# Altium PCB Copy of CAN_ESP.PcbDoc (part 2 of 2)
Units mm, origin at the board's own origin, x right, y up, seen from the top; angles counter-clockwise.
Board outline 43.47 x 32.7 mm, 2 copper layers (Top Layer, Bottom Layer), stack 1.1 mm thick; 66 components, 64 nets, 253 pads, 221 vias.
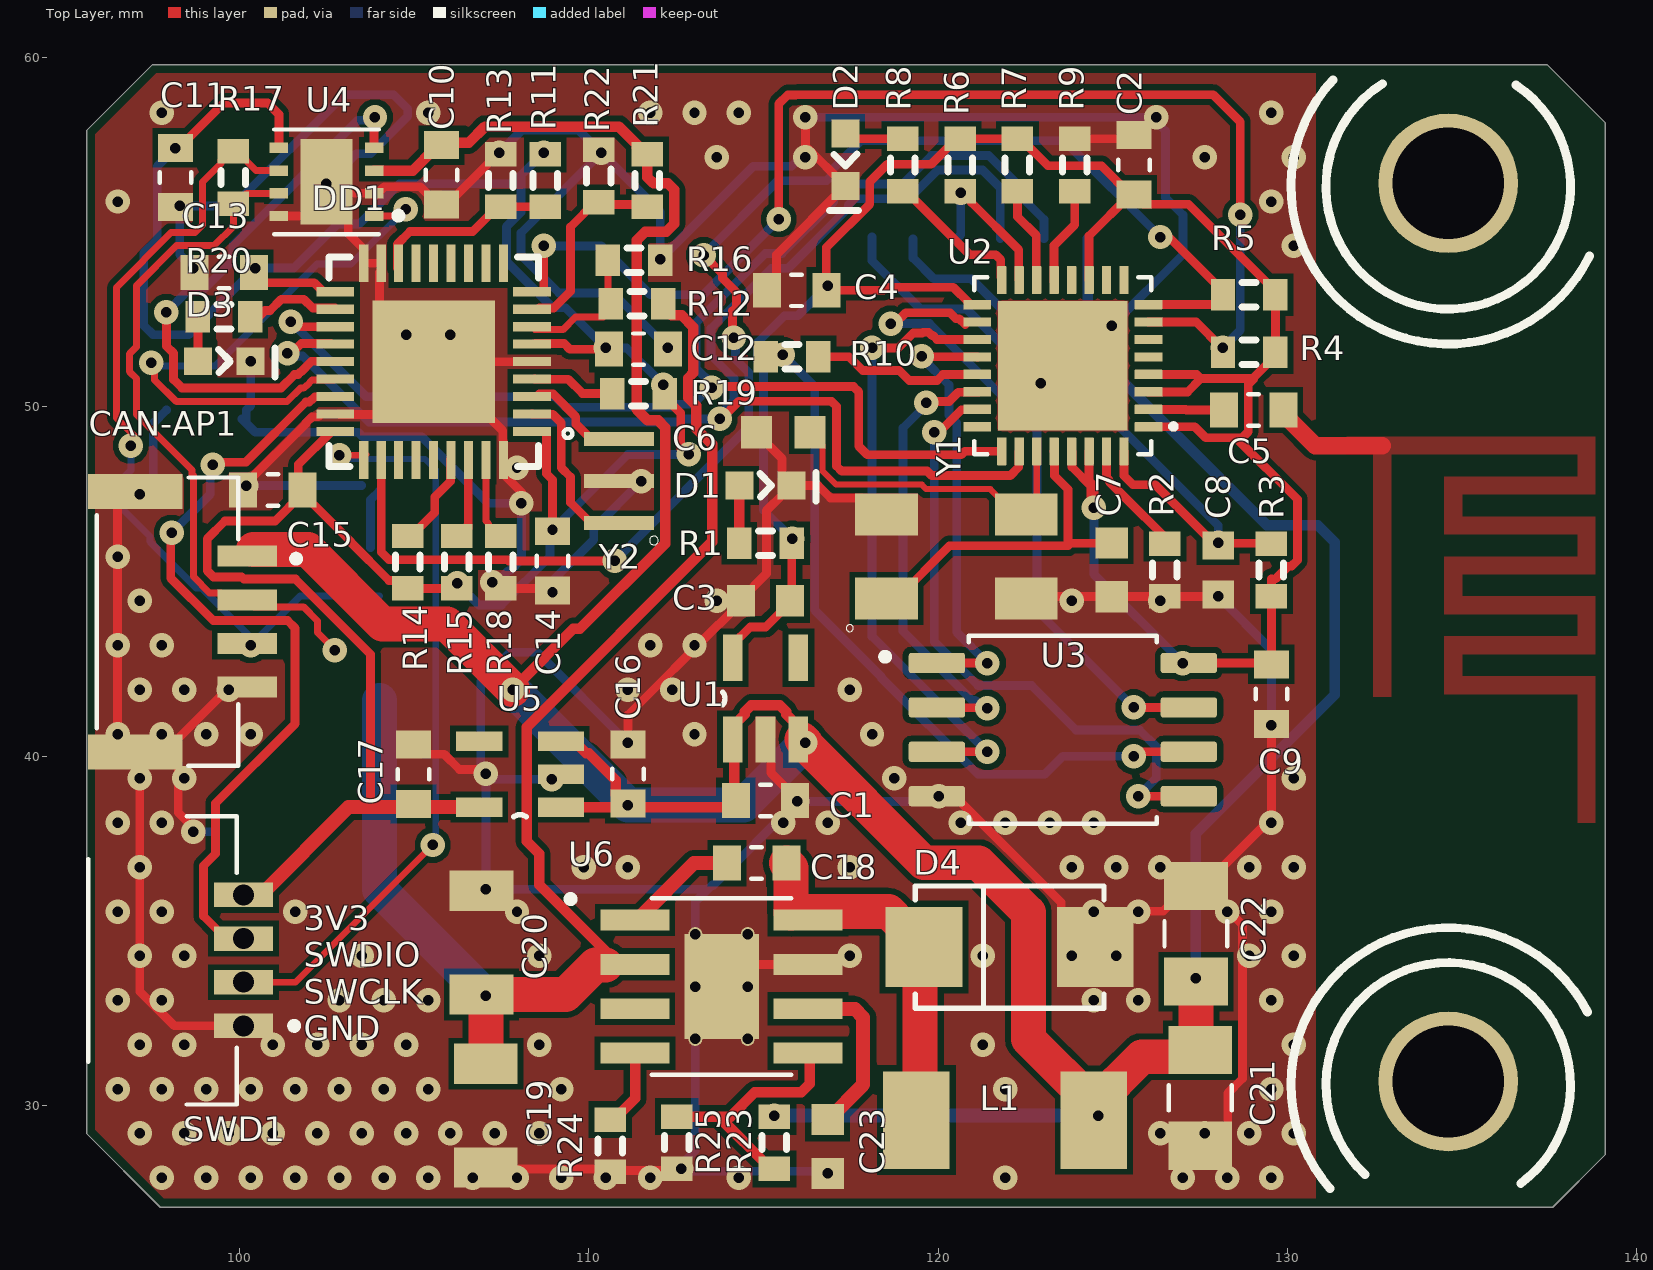
[diagram p0: Top Layer view]

## Silkscreen, mask and mechanical layers (free items; w line width, h text height) (continued)
Bottom Overlay: (continued)
  lines w0.254: 97.772,34.479 ccw(c134.62,56.642) 102.885,27.627 ; 98.122,35.86 ccw(c134.62,56.642) 104.16,27.725 ; 99.095,36.172 ccw(c134.62,56.642) 105.629,27.651 ; 102.711,59.057 ccw(c134.62,56.642) 103.102,51.11 ; 103.473,31.544 ccw(c134.62,56.642) 105.759,28.946 ; 103.714,59.058 ccw(c134.62,56.642) 104.089,51.269 ; 104.718,59.06 ccw(c134.62,56.642) 105.99,47.679 ; 105.721,59.061 ccw(c134.62,56.642) 107.083,47.546 ; 106.724,59.051 ccw(c134.62,56.642) 133.088,28.684 ; 107.728,59.052 ccw(c134.62,56.642) 132.1,29.76 ; 109.207,59.056 ccw(c135.125,56.989) 131.679,31.218 ; 110.211,59.057 ccw(c135.125,56.989) 132.124,32.17 ; 111.213,59.047 ccw(c135.125,56.989) 133.469,33.046 ; 112.217,59.048 ccw(c135.125,56.989) 117.428,42.298 ; 113.222,59.049 ccw(c135.125,56.989) 118.536,42.539 ; 114.226,59.05 ccw(c135.125,56.989) 119.997,42.424 ; 115.798,54.046 ccw(c134.62,56.642) 121.733,42.681 ; 116.814,54.004 ccw(c134.62,56.642) 122.233,43.582 ; 117.95,53.308 ccw(c134.62,56.642) 123.657,43.649 ; 118.961,53.359 ccw(c134.62,56.642) 124.92,43.918 ; 119.957,53.482 ccw(c134.62,56.642) 122.362,47.997 ; 121.038,53.247 ccw(c134.62,56.642) 123.169,48.588 ; 122.001,53.518 ccw(c134.62,56.642) 123.668,49.638 ; 122.993,53.673 ccw(c134.62,56.642) 124.33,50.468 ; 124.305,52.822 ccw(c134.62,56.642) 124.998,51.311 ; 125.024,53.827 ccw(c134.62,56.642) 125.945,51.667 ; 125.831,54.703 ccw(c134.62,56.642) 127.011,51.836 ; 126.874,54.643 ccw(c134.62,56.642) 127.983,52.175 ; 127.761,58.039 ccw(c134.62,56.642) 128.816,52.728 ; 129.132,59.067 ccw(c134.62,56.642) 137.773,51.537 ; 130.226,59.027 ccw(c134.62,56.642) 137.874,52.846 ; 131.435,59.062 ccw(c134.62,56.642) 137.805,54.222 ; 132.761,58.87 ccw(c134.62,56.515) 136.494,58.858
  text "Vin / Vin / H / L / GND / GND" at 106.045,47.244 h0.7 r180
  text "CAN 2 Wi-Fi v2 / raccoonlab.org/uavcan / @sainquake" at 132.08,39.37 h0.7
Mechanical 2:
  lines w0.2: 95.631,29.21 95.631,54.868 95.631,57.912 97.519,59.8 108.1,59.8 137.431,59.8 139.1,58.131 139.1,28.61 137.59,27.1 110.1,27.1 97.741,27.1 95.631,29.21